# Altium PCB Fighter_V1.0.PcbDoc
Units mil, origin at the board's own origin, x right, y up, seen from the top; angles counter-clockwise.
Board outline 6000 x 4000 mil, 2 copper layers (Top Layer, Bottom Layer); 32 components, 22 nets, 116 pads, 0 vias.
Unrouted connection lines stored in the file: 55.
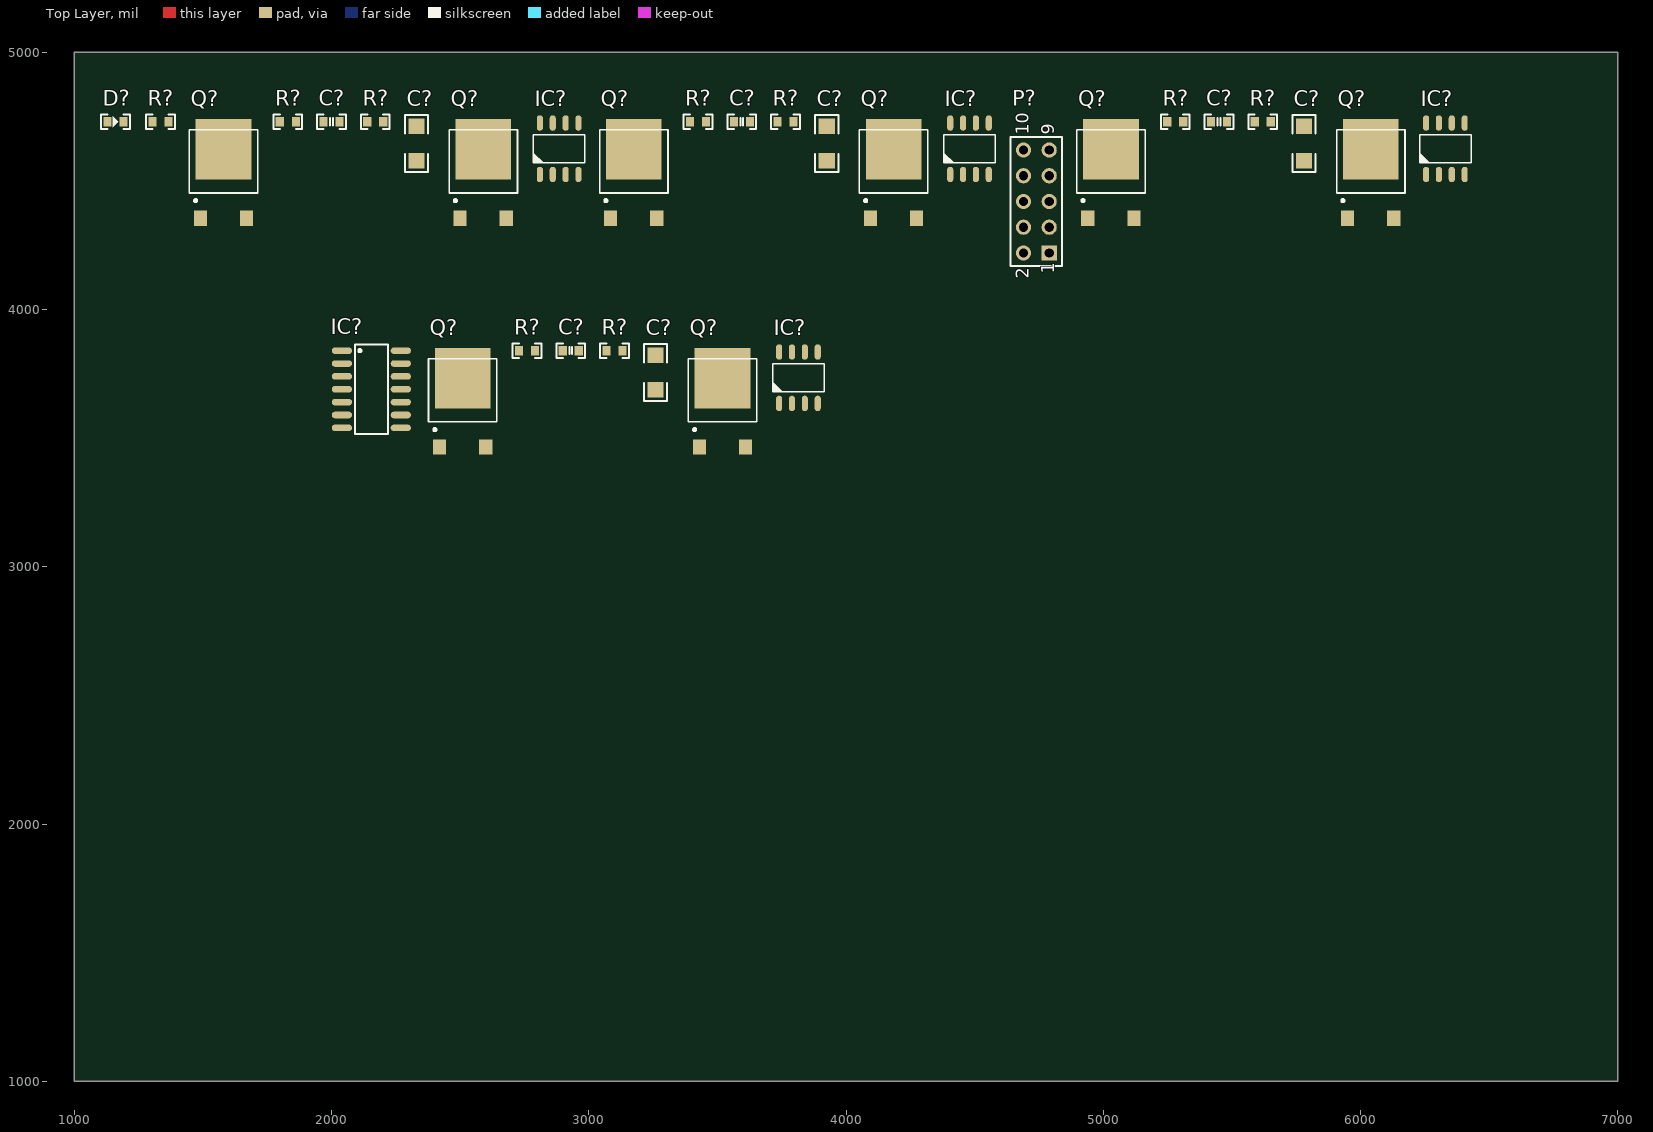
[diagram p0: Top Layer view]
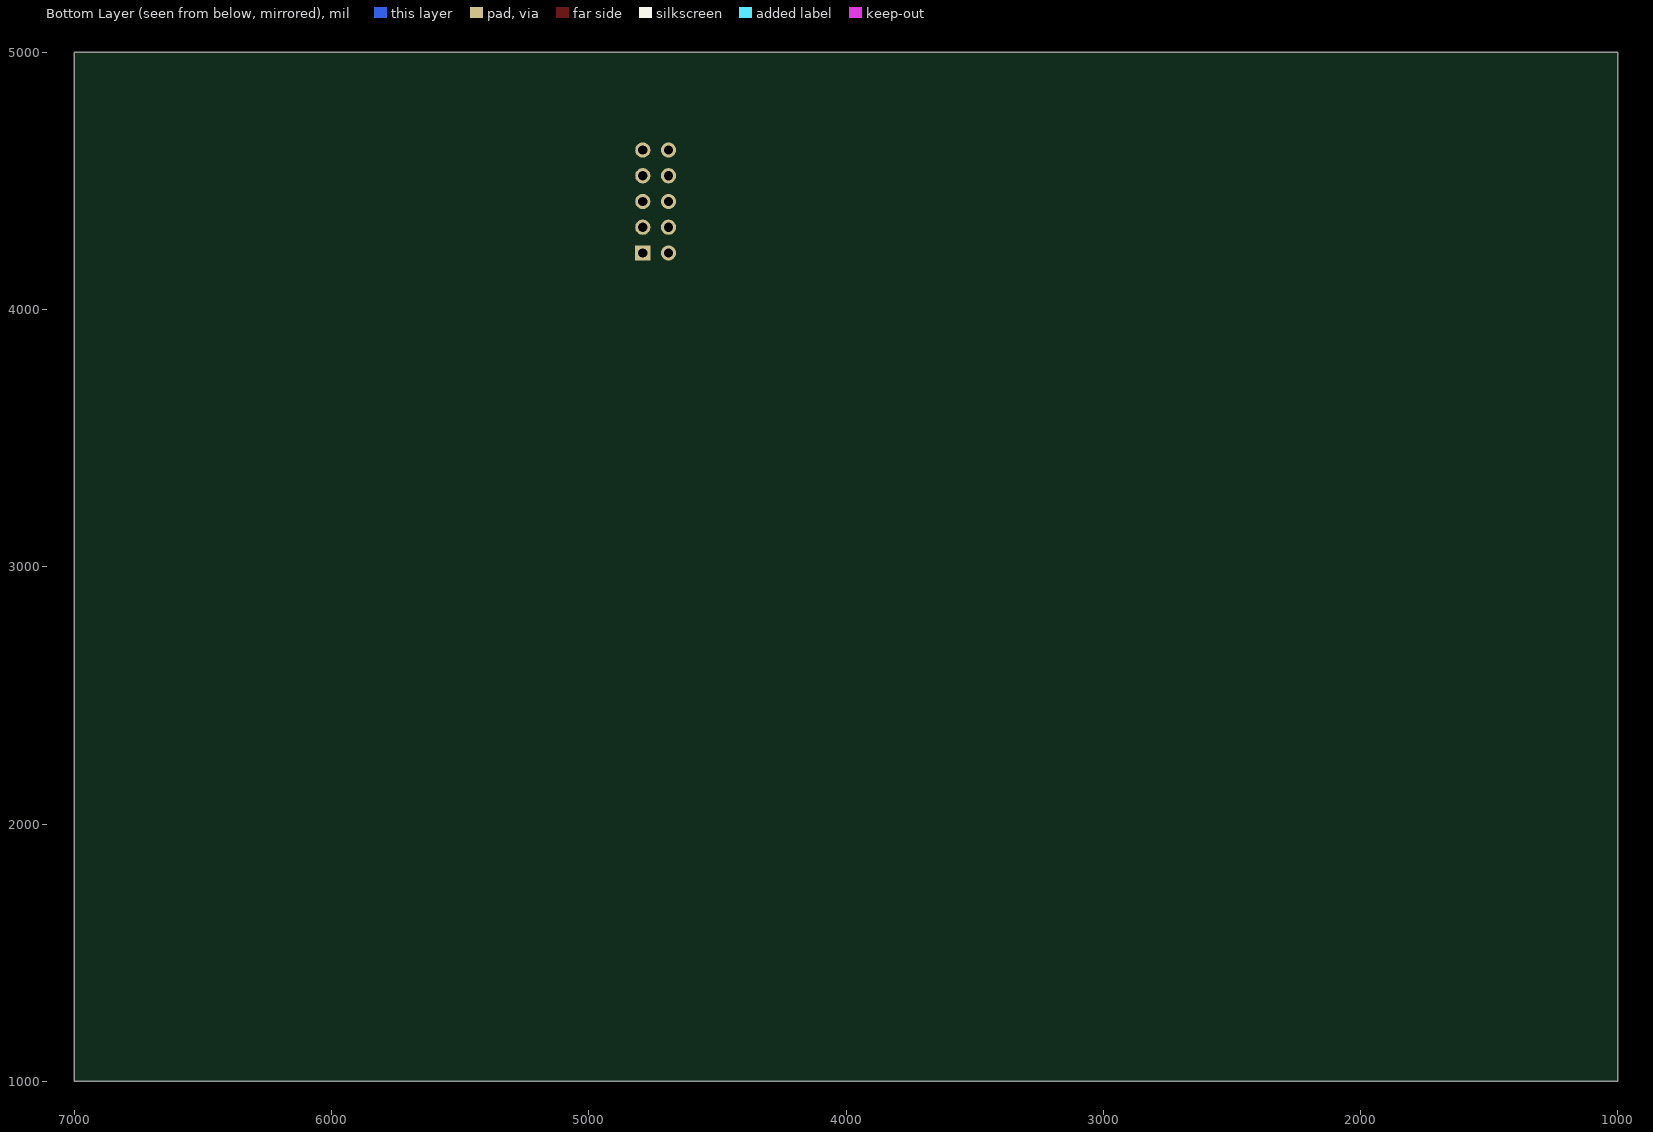
[diagram p1: Bottom Layer view, seen from below]

## Layer stack, top to bottom
Top Solder: solder mask 0.4, Solder Resist, Dk 3.5
Top Layer: signal copper 1.4
Dielectric 1: dielectric 12.6, FR-4, Dk 4.8
Bottom Layer: signal copper 1.4
Bottom Solder: solder mask 0.4, Solder Resist, Dk 3.5

## Board outline
1000,1000 7000,1000 7000,5000 1000,5000

## Design rules (kind name [scope] priority, off if disabled: settings)
Clearance [All] p1: gap=10 ignorepadtopadclearanceinfootprint=FALSE except(0: Arc-Hole Track-Hole SMDPad-Hole THPad-Hole Via-Hole Fill-Hole Poly-Hole Region-Hole Text-Hole)
PolygonConnect [All] p1: connectstyle=Relief reliefconductorwidth=10 reliefentries=4 polygonreliefangle="90 Angle" airgapwidth=10
RoutingVias [All] p1: holewidth=28 width=50 viastyle="Through Hole" minholewidth=28 minwidth=50 maxholewidth=28 maxwidth=50
SolderMaskExpansion [All] p1: expansion=4 istentingtop=FALSE
Width [All] p1: maxlimit=10 minlimit=10 preferedwidth=10
30 further rules are at their usual default settings.

## Classes and differential pairs
component class Fighter_V1: C? D? DZ? IC? P? Q? R?

## Components (designator, comment, footprint, x,y, rotation, side; value= is the part's Value field where it differs from the comment)
C? "1uF" CAP-1206 3260,3755 r90 top
C? "100nF" CAP-0603 5450,4730 r0 top
C? "1uF" CAP-1206 3925,4645 r90 top
C? "100nF" CAP-0603 3595,4730 r0 top
C? "1uF" CAP-1206 2330,4645 r90 top
C? "100nF" CAP-0603 2000,4730 r0 top
C? "100nF" CAP-0603 2930,3840 r0 top
C? "1uF" CAP-1206 5780,4645 r90 top
D? "RED" LED-0603 1160,4730 r0 top
IC? "SN74HC08D" SOIC_14 2155,3690 r0 top
IC? "IR2103S" SOIC_8 2885,4625 r0 top
IC? "IR2103S" SOIC_8 3815,3735 r0 top
IC? "IR2103S" SOIC_8 6330,4625 r0 top
IC? "IR2103S" SOIC_8 4480,4625 r0 top
P? "Header 5X2" HDR2X5 4790,4220 r90 top
Q? "IRLR7843" TO-252 3430,3465 r90 top
Q? "IRLR7843" TO-252 1490,4355 r90 top
Q? "IRLR7843" TO-252 4095,4355 r90 top
Q? "IRLR7843" TO-252 3085,4355 r90 top
Q? "IRLR7843" TO-252 5950,4355 r90 top
Q? "IRLR7843" TO-252 2500,4355 r90 top
Q? "IRLR7843" TO-252 2420,3465 r90 top
Q? "IRLR7843" TO-252 4940,4355 r90 top
R? "10R" R-0603 1830,4730 r0 top
R? "10R" R-0603 5280,4730 r0 top
R? "10R" R-0603 2760,3840 r0 top
R? "10R" R-0603 5620,4730 r0 top
R? "10R" R-0603 2170,4730 r0 top
R? "10R" R-0603 3100,3840 r0 top
R? "10R" R-0603 3765,4730 r0 top
R? "10k" R-0603 1335,4730 r0 top
R? "10R" R-0603 3425,4730 r0 top

## Footprints (in the part's own frame and the unit in brackets; to place one, negate y for a bottom-side part, rotate by r counter-clockwise, add the part's x,y. Pads: shape width x height; smd on the part's side, far side on the other; paste and mask are expansions set on the pad)
CAP-0603 [mm]
  rect 0.8x0.96 smd: 1(-0.79,0) 2(0.79,0)
  silkscreen extent -1.42,-0.71 1.42,0.71, body extent -0.76,-0.39 0.76,0.39, height 0.9
CAP-1206 [mm] "贴片元件"
  rect 1.524x1.6 smd: 1(-1.703,0) 2(1.7,0)
  silkscreen extent -2.83,-1.14 2.83,1.14, body extent -1.91,-0.89 1.91,0.89, height 1
HDR2X5 [mm] "Connector; Header; 5x2 Position"
  rect 1.5x1.5 hole 0.9: 1(0,0)
  round 1.5 hole 0.9: 2(0,2.54) 3(2.54,0) 4(2.54,2.54) 5(5.08,0) 6(5.08,2.54) 7(7.62,0) 8(7.62,2.54) 9(10.16,0) 10(10.16,2.54)
  silkscreen extent -1.27,-1.27 11.43,3.81
LED-0603 [mm]
  rect 0.8x0.96 smd: 1(-0.79,0) 2(0.79,0)
  silkscreen extent -1.42,-0.71 1.42,0.71, body extent -0.81,-0.4 0.81,0.4, height 0.6
R-0603 [mm]
  rect 0.8x0.96 smd: 1(-0.79,0) 2(0.79,0)
  silkscreen extent -1.42,-0.71 1.42,0.71, body extent -0.76,-0.38 0.76,0.38, height 0.41
SOIC_8 [mil]
  oval 24x60 smd: 1(-75,-100.02) 2(-25,-100.02) 3(25,-100.02) 4(75,-100.02) 5(75,99.98) 6(25,99.98) 7(-25,99.98) 8(-75,99.98)
  silkscreen extent -100,-55 100,55, body extent -96,-118 96,118, height 69
SOIC_14 [mm]
  oval 2x0.65 smd: 1(-2.906,3.81) 2(-2.906,2.54) 3(-2.906,1.27) 4(-2.906,0) 5(-2.906,-1.27) 6(-2.906,-2.54) 7(-2.906,-3.81) 8(2.906,-3.81) 9(2.906,-2.54) 10(2.906,-1.27) 11(2.906,0) 12(2.906,1.27) 13(2.906,2.54) 14(2.906,3.81)
  silkscreen extent -1.63,-4.4 1.63,4.4, body extent -3.01,-4.3 3.01,4.3, height 1.66
TO-252 [mm] "贴片MOS管"
  rect 1.5x1.3 smd: 1(0,0) 2(0,-4.56)
  rect 6x5.5 smd: 3(6.8,-2.29)
  silkscreen extent 1.61,-5.66 8.74,1.09, body extent -0.56,-5.65 9.54,1.08, height 2.37

## Part data
C? C? C? C? C? C? C? C?: library part CAP, "贴片电容", Package=0402, SuppliersPartNumber=C52923, ComponentLink1Description=供应商链接, ComponentLink1URL=http://www.szlcsc.com/product/details_53938.html, Supplier=LC
D?: library part LED, "发光二极管", Package=0603, SuppliersPartNumber=C2290, ComponentLink1Description=供应商链接, ComponentLink1URL=http://www.szlcsc.com/product/details_2663.html, Supplier=LC
IC?: "Integrated Circuit", Manufacturer_Name="Texas Instruments", Mouser Part Number=595-SN74HC08D, Arrow Part Number=SN74HC08D, Arrow Price/Stock=https://www.arrow.com/en/products/sn74hc08d/texas-instruments, Datasheet Link=http://docs-emea.rs-online.com/webdocs/0b80/0900766b80b80bbb.pdf, Height=1.75mm, Manufacturer_Part_Number=SN74HC08D, Mouser Price/Stock=https://www.mouser.co.uk/ProductDetail/Texas-Instruments/SN74HC08D?qs=st7IWvlL5%2FjpJg0KgrS5HQ%3D%3D
IC? IC? IC? IC?: "Integrated Circuit", Manufacturer_Name="International Rectifier", Manufacturer_Part_Number=IR2103SPBF, Datasheet Link=https://www.infineon.com/dgdl/ir2103.pdf?fileId=5546d462533600a4015355c7b54b166f, Height=1.75mm
P?: "Header, 5-Pin, Dual row", LatestRevisionDate=17-Jul-2002, LatestRevisionNote="Re-released for DXP Platform.", Publisher="Altium Limited"
Q? Q? Q? Q? Q? Q? Q? Q?: "HEXFET Power MOSFET", Code_JEDEC=TO-252-AA, ComponentLink1Description="Manufacturer Link", ComponentLink1URL=http://www.irf.com/, ComponentLink2Description=Datasheet, ComponentLink2URL=http://www.irf.com/product-info/datasheets/data/irfr1205.pdf, DatasheetVersion=PD-91318B, LatestRevisionDate=20-Nov-2009, LatestRevisionNote="IPC-7351 Footprint Added.", Note="Pin 2 is trimmed and is electrically connected to Drain.", PackageDescription="3-Pin HEXFET Package 2.28 mm Pitch, 9.9 mm Lead Span", PackageReference=TO-252AA, PackageVersion=Feb-2003, Published=8-Jun-2000, Publisher="Altium Limited"
R? R? R? R? R? R? R? R? R?: library part RES, "贴片电阻", Package=0805, SuppliersPartNumber=C17798, Supplier=LC

## Nets (pads, with @x,y where several pads share a name; then routed paths per layer and width w, separated by ;. In a path a pad name is that pad's centre, name@x,y a point inside that pad or via, vN(x,y) a via of type N, cw(c..) or ccw(c..) an arc to the next point about the centre after c; other vN are vias at no path point)
5V: C?.2@2031.1,4730 C?.2@2961.1,3840 C?.2@3626.1,4730 C?.2@5481.1,4730 IC?.1@2810,4524.98 IC?.1@3740,3634.98 IC?.1@4405,4524.98 IC?.1@6255,4524.98 IC?.14 R?.1@1303.9,4730
A1: IC?.1@2040.57,3840
A2: IC?.4@2040.57,3690 P?.8
B1: IC?.9
B2: IC?.12 P?.7
GND: C?.1@1968.9,4730 C?.1@2898.9,3840 C?.1@3563.9,4730 C?.1@5418.9,4730 IC?.4@2960,4524.98 IC?.4@3890,3634.98 IC?.4@4555,4524.98 IC?.4@6405,4524.98 IC?.7@2040.57,3540 P?.1 P?.9 P?.10 Q?.3@1580.16,4622.72 Q?.3@2510.16,3732.72 Q?.3@3175.16,4622.72 Q?.3@5030.16,4622.72
M1+: C?.2@3260,3821.93 IC?.6@3840,3834.98 Q?.3@3520.16,3732.72
M1-: C?.2@5780,4711.93 IC?.6@6355,4724.98 Q?.3@6040.16,4622.72
M2+: C?.2@3925,4711.93 IC?.6@4505,4724.98 P?.5 Q?.3@4185.16,4622.72
M2-: C?.2@2330,4711.93 IC?.6@2910,4724.98 P?.6 Q?.3@2590.16,4622.72
NetC?_1: C?.1@2330,4577.95 D?.2 IC?.8@2810,4724.98
NetD?_A: D?.1 R?.2@1366.1,4730
NetIC?_5: IC?.5@2960,4724.98 R?.1@1798.9,4730
NetIC?_7: IC?.7@2860,4724.98 R?.1@2138.9,4730
NetQ?_1: Q?.1@1490,4355 R?.2@1861.1,4730
PA: IC?.2@2040.57,3790 IC?.5@2040.57,3640 P?.4
PB: IC?.10 IC?.13 P?.3
VIN: C?.1@3260,3687.95 P?.2
YA1: IC?.2@2860,4524.98 IC?.2@3790,3634.98 IC?.2@4455,4524.98 IC?.2@6305,4524.98 IC?.3
YA2: IC?.6@2040.57,3590
YB1: IC?.8@2269.43,3540
YB2: IC?.11
pads on no net: C?.1@3925,4577.95 C?.1@5780,4577.95 IC?.5@3890,3834.98 IC?.5@4555,4724.98 IC?.5@6405,4724.98 IC?.7@3790,3834.98 IC?.7@4455,4724.98 IC?.7@6305,4724.98 IC?.8@3740,3834.98 IC?.8@4405,4724.98 IC?.8@6255,4724.98 Q?.1@2420,3465 Q?.1@2500,4355 Q?.1@3085,4355 Q?.1@3430,3465 Q?.1@4095,4355 Q?.1@4940,4355 Q?.1@5950,4355 Q?.2 R?.1@2728.9,3840 R?.1@3068.9,3840 R?.1@3393.9,4730 R?.1@3733.9,4730 R?.1@5248.9,4730 R?.1@5588.9,4730 R?.2@2201.1,4730 R?.2@2791.1,3840 R?.2@3131.1,3840 R?.2@3456.1,4730 R?.2@3796.1,4730 R?.2@5311.1,4730 R?.2@5651.1,4730

## Text inside footprints (layer, text, board x,y; h text height)
P?: Top Overlay "10" at 4710,4680 h50 r90; Top Overlay "9" at 4810,4680 h50 r90; Top Overlay "1" at 4810,4140 h50 r90; Top Overlay "2" at 4710,4120 h50 r90